# EAGLE board BluewalkerSchematic (EAGLE 7.2.0)
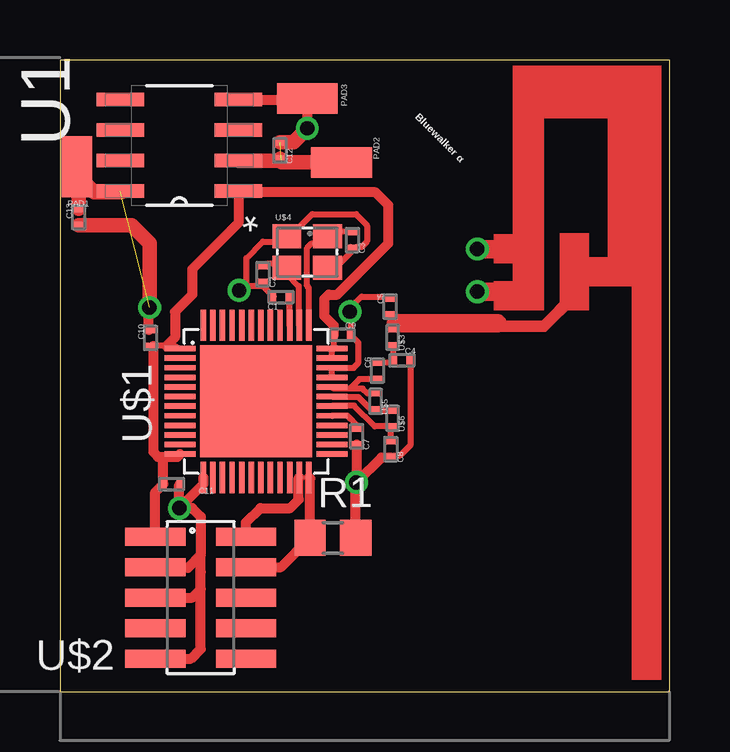
[diagram p0: board, top side]
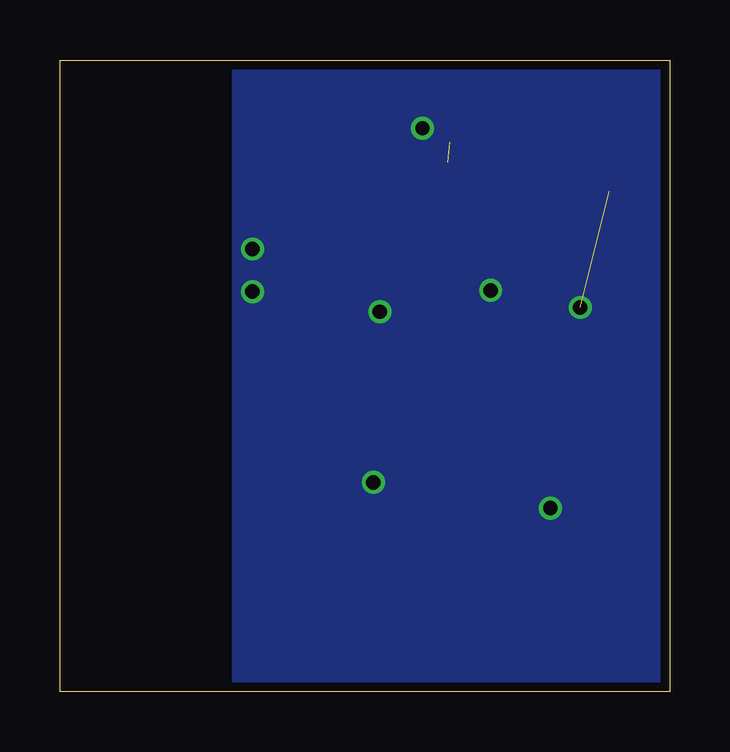
[diagram p1: board, bottom side, seen from below]

Size 25.43 x 26.31 mm. Coordinates in mm from the lower left corner, seen from the top.
Outline: 0,0 25.43,0 25.43,26.31 0,26.31 0,0
Copper layers (1*16): Top 0.0356mm / dielectric 1.5011mm / Bottom 0.0356mm
Design rules "LaenPCBOrder": minimum track width 6mil, minimum drill 13mil, track to track 6mil, track to pad 6mil, pad to pad 6mil, via to via 6mil, smd to smd 6mil, copper to edge 15mil, drill to drill 6mil, minimum pad ring 7mil, minimum via ring 7mil, stop-mask expansion 3mil, vias tented up to drill 0mil, thermal gap 10mil

## Footprints (pad centres in the part's own frame; a part is rotated, then mirrored left to right if it is on the bottom)
0402CAPACITOR = smd 0.3 x 0.5: 1 0.15,0.25; 2 0.85,0.25
SMD1,27-2,54 = smd 1.27 x 2.54: 1 0,0
R0805 = smd 1.3 x 1.5: 1 -0.95,0; 2 0.95,0
SOIC127P600X175-8N = smd 1.981 x 0.559: 1 -2.464,1.905; 2 -2.464,0.635; 3 -2.464,-0.635; 4 -2.464,-1.905; 5 2.464,-1.905; 6 2.464,-0.635; 7 2.464,0.635; 8 2.464,1.905
QFN48 = smd 1.3 x 0.226: 1 -3.17,2.2; 2 -3.17,1.8; 3 -3.17,1.4; 4 -3.17,1; 5 -3.17,0.6; 6 -3.17,0.2; 7 -3.17,-0.2; 8 -3.17,-0.6; 9 -3.17,-1; 10 -3.17,-1.4; 11 -3.17,-1.8; 12 -3.17,-2.2; 25 3.17,-2.2; 26 3.17,-1.8; 27 3.17,-1.4; 28 3.17,-1; 29 3.17,-0.6; 30 3.17,-0.2; 31 3.17,0.2; 32 3.17,0.6; 33 3.17,1; 34 3.17,1.4; 35 3.17,1.8; 36 3.17,2.2 | smd 0.226 x 1.3: 13 -2.2,-3.17; 14 -1.8,-3.17; 15 -1.4,-3.17; 16 -1,-3.17; 17 -0.6,-3.17; 18 -0.2,-3.17; 19 0.2,-3.17; 20 0.6,-3.17; 21 1,-3.17; 22 1.4,-3.17; 23 1.8,-3.17; 24 2.2,-3.17; 37 2.2,3.17; 38 1.8,3.17; 39 1.4,3.17; 40 1,3.17; 41 0.6,3.17; 42 0.2,3.17; 43 -0.2,3.17; 44 -0.6,3.17; 45 -1,3.17; 46 -1.4,3.17; 47 -1.8,3.17; 48 -2.2,3.17 | smd 4.66 x 4.66: GND 0,0
M50-3600742 = smd 0.74 x 2.515: 1 -2.54,-1.893; 2 -2.54,1.893; 3 -1.27,-1.893; 4 -1.27,1.893; 5 0,-1.893; 6 0,1.893; 7 1.27,-1.893; 8 1.27,1.893; 9 2.54,-1.893; 10 2.54,1.893
0402INDUCTOR = smd 0.25 x 0.5: 1 -0.33,0; 2 0.33,0
2.5X2MM = smd 1.2 x 1: GND 0.85,-0.65; GND2 -0.85,0.65; X1 -0.85,-0.65; X2 0.85,0.65

## Placement (x,y rotation side)
C1  100nF  [0402CAPACITOR]  8.71,16.18 0 top
C2  12pF  [0402CAPACITOR]  8.71,16.89 90 top
C3  12pF  [0402CAPACITOR]  12.45,18.31 90 top
C4  1pF  [0402CAPACITOR]  14.76,14.05 180 top
C5  1.5pF  [0402CAPACITOR]  13.51,16.54 270 top
C6  2.2pF  [0402CAPACITOR]  12.98,13.87 270 top
C7  47nF  [0402CAPACITOR]  12.62,10.13 90 top
C8  2.2nF  [0402CAPACITOR]  14.05,9.6 90 top
C9  1nF  [0402CAPACITOR]  12.27,15.11 180 top
C10  100nF  [0402CAPACITOR]  3.53,15.24 270 top
C11  100nF  [0402CAPACITOR]  5.16,8.89 180 top
C12  .047uF  [0402CAPACITOR]  9.42,22.05 90 top
C13  .047uF  [0402CAPACITOR]  0.53,20.27 270 top
PAD1  [SMD1,27-2,54]  0.71,21.87 180 top
PAD2  [SMD1,27-2,54]  11.73,22.05 270 top
PAD3  [SMD1,27-2,54]  10.31,24.71 270 top
R1  12 k  [R0805]  11.38,6.4 0 top
U1  ICL7673CBAZA  [SOIC127P600X175-8N]  4.98,22.76 180 top
U$1  NRF51822  [QFN48]  8.18,12.09 0 top
U$2  PIN_HEADER_IO  [M50-3600742]  5.87,3.91 270 top
U$3  3.3 nH  [0402INDUCTOR]  13.87,14.76 90 top
U$4  CRYSTAL2.5X2  [2.5X2MM]  10.31,18.31 180 top
U$5  4.7 nH  [0402INDUCTOR]  13.16,12.09 90 top
U$6  10 nH  [0402INDUCTOR]  13.87,11.38 90 top

## Library data of the parts
C1-C13 U$3 U$5 U$6 = SKY CUSTOM STUFF
PAD1-PAD3 = wirepad
R1 = rcl
U1 = Intersil_By_element14_Batch_1; MPN: ICL7673CBAZA; OC_FARNELL: 9663746; OC_NEWARK: 92K0566; PACKAGE: SOIC-8; SUPPLIER: Intersil
U$1 U$2 U$4 = NordicSemi

## Nets
GND: C10.1
GROUND: C1.1 C2.1 C3.1 C4.1 C5.1 C7.1 C8.1 C9.1 C11.1 PAD3.1 R1.2 U1.4 U$1.13 U$1.33 U$1.34 U$2.3 U$2.5 U$2.9 U$4.GND U$4.GND2
N$1: C1.2 U$1.39
N$2: C2.2 U$1.38 U$4.X2
N$3: C3.2 U$1.37 U$4.X1
N$4: C7.2 U$1.29
N$5: C12.2 U1.2
N$7: C13.2 U1.8
N$8: C6.2 U$1.32 U$5.2
N$9: U$1.23 U$2.2
N$10: R1.1 U$1.24 U$2.4
N$11: C8.2 U$1.30 U$6.1
N$13: U$1.31 U$5.1 U$6.2
N$15: C13.1 PAD1.1
N$16: C12.1 PAD2.1
N$17: C4.2 C6.1 U$3.1
N$18: C5.2 U$3.2
VCC: C9.2 C10.2 C11.2 U1.1 U$1.1 U$1.12 U$1.35 U$1.36 U$2.1

## Tracks (layer width: path | path; a pad name or v marks a point on that pad's centre or on a via)
GROUND  (via drill 0.6)
  Top 0.254: U$1.33 U$1.34 12.25,13.49 12.45,13.69 12.45,14.54 C9.1 12.12,15.09 12.12,15.77 v12.09,15.82 12.12,16 12.57,16.46 13.72,16.46 C5.1 | U$4.GND2 11.2,17.83 11.66,17.83 12.12,18.29 12.12,18.52 C3.1 12.34,18.52 12.57,18.52 12.8,18.75 12.8,19.43 12.34,19.89 10.52,19.89 9.6,18.97 U$4.GND 9.37,18.75 8.46,18.75 7.77,18.06 7.77,16.92 | 8.46,16.92 8.91,16.46 C1.1 | C4.1 14.63,13.72 14.63,10.29 14.17,9.83 13.95,9.83 C8.1 | 7.77,16.92 7.54,16.92 v7.47,16.71 7.77,16.92 | 7.77,16.92 8.46,16.92 | 8.46,16.92 C2.1
  Top 0.406: U1.4 10.26,24.66 PAD3.1 v10.31,23.47 | 3.71,15.06 3.71,15.98 v3.73,16 | C7.1 12.37,8.73 v12.36,8.71 | C8.1 13.4,9.75 v12.36,8.71 | R1.2 12.33,8.68 v12.36,8.71 | U$1.13 5.98,8.65 v4.98,7.64 | v4.98,7.64 4.98,8.61 C11.1 | v4.98,7.64 5.51,7.64 5.87,7.29 5.87,5.69 | 5.87,5.69 5.33,5.16 4,5.16 U$2.3 | U$2.5 5.51,3.91 5.87,4.27 | 5.87,4.27 5.87,4.98 5.87,5.69 | U$2.9 5.46,1.37 5.87,1.78 5.87,4.27
  Top 0.762: 18.82,16.66 v17.4,16.66 | 18.46,18.44 v17.4,18.44
  Bottom 0.406: v10.31,23.47 10.31,23.29
  pour Bottom: 0,0 18.03,0 18.03,26.42 0,26.42
N$1
  Top 0.254: C1.2 9.56,15.28 U$1.39
N$2
  Top 0.254: U$1.38 9.96,15.28 9.96,16.89 9.46,17.39 U$4.X2 9.37,17.83 8.69,17.83 C2.2
N$3
  Top 0.254: U$1.37 10.38,16.82 10.31,16.89 10.31,18.49 10.49,18.67 10.87,18.67 U$4.X1 11.36,19.16 C3.2
N$4
  Top 0.254: C7.2 12.37,11.1 12.09,11.38 11.98,11.49 U$1.29
N$5  (1 unrouted)
  Top 0.61: C12.2 9.74,22.9 10.31,23.47 | U1.2 9.17,22.12 9.25,22.05
N$7  (1 unrouted)
  Top 0.406: 2.63,20.74 U1.8
  Top 0.61: C13.2 2.98,19.42 3.73,18.67 3.73,16
N$8
  Top 0.254: U$5.2 12.83,12.42 12.62,12.62 12.09,12.62 | 12.09,12.62 11.41,12.62 U$1.32 | C6.2 12.48,13.02 12.09,12.62
N$9
  Top 0.406: U$2.2 7.76,7.05 8.36,7.64 9.6,7.64 9.96,8 9.96,8.9 U$1.23
N$10
  Top 0.406: U$2.4 9.21,5.18 R1.1 10.43,8.87 U$1.24
N$11
  Top 0.254: C8.2 13.8,10.98 U$6.1 13.13,11.05 12.27,11.91 11.37,11.91 U$1.30
N$13
  Top 0.254: U$1.31 11.37,12.27 12.45,12.27 12.95,11.76 U$5.1 13.21,11.71 U$6.2
N$15
  Top 0.61: 2.49,20.8 1.42,20.8 0.71,21.51 PAD1.1 0.78,21.8 C13.1
N$16
  Top 0.61: PAD2.1 9.32,22.05 C12.1
N$17
  Top 0.254: 13.9,13.76 C4.2 | C6.1 13.83,13.72 C4.2 | C4.2 13.91,14.39 U$3.1
N$18
  Top 0.254: U$3.2 13.87,15.5 | C5.2 13.87,15.58 13.87,15.5 | 13.87,15.5 14.02,15.34
  Top 0.762: 14.02,15.34 18.23,15.34
VCC
  Top 0.254: U$1.35 U$1.36 11.43,14.4 C9.2 | U$1.1 4.8,14.4 4.45,14.4 3.89,14.4 C10.2 | 4.8,9.83 U$1.12
  Top 0.406: 4.45,14.4 4.8,14.76 4.8,15.82 5.51,16.54 5.51,17.6 7.44,19.53 U1.1 7.49,20.8 13.16,20.8 13.69,20.27 13.69,18.67 11.56,16.54 11.2,16.54 11.02,16.36 11.02,15.65 11.42,15.25 C9.2 | 3.89,14.4 3.89,9.98 4.09,9.78 4.45,9.78 | 4.45,9.78 4.9,9.78 U$1.12 | U$2.1 3.98,8.31 C11.2 4.31,9.64 4.45,9.78
(copper drawn outside any net)
  shapes: Top area x10

## Text on the board
tPlace: Bluewalker α